# EAGLE board Botanic Buddy Design files (EAGLE 9.7.0)

Size 327.24 x 195.34 mm. Coordinates in mm from the lower left corner, seen from the top.
Outline: 0,0 327.24,0 327.24,195.34 0,195.34 0,0
Copper layers (1*16): Top 0.035mm / dielectric 1.5mm / Bottom 0.035mm
Design rules "default": minimum track width 6mil, minimum drill 0.35mm, track to track 6mil, track to pad 6mil, pad to pad 6mil, via to via 6mil, smd to smd 6mil, copper to edge 40mil, drill to drill 6mil, minimum pad ring 10mil, minimum via ring 8mil, stop-mask expansion 4mil, vias tented up to drill 0mil, thermal gap 10mil

## Footprints (pad centres in the part's own frame; a part is rotated, then mirrored left to right if it is on the bottom)
LEDRD254W60D565H860B = drill 0.981 pad 1.581: 1 -1.27,0; 2 1.27,0
LEDRD254W60D565H860B_G = drill 0.981 pad 1.581: 1 -1.27,0; 2 1.27,0
LEDRD254W60D565H860B_Y = drill 0.981 pad 1.581: 1 -1.27,0; 2 1.27,0
LEDRD254W60D565H860B_O = drill 0.981 pad 1.581: 1 -1.27,0; 2 1.27,0
1X02 = drill 1.016 long: 1 -1.27,0; 2 1.27,0
MOTOR = drill 1.118 pad 3.15 octagon: + 2.54,0; - -2.54,0
PIEZO = drill 1 pad 1.6: 1 -3.5,0; 2 3.5,0
SENRD254W50D503H320B = drill 0.7 pad 1.3: 1 -1.27,0; 2 1.27,0
RESAD1016W63L850D250B = drill 0.83 pad 1.43: 1 -5.08,0; 2 5.08,0
HA-06-SM065 = drill 1 pad 1.676: 1 -2.54,-2.54; 2 0,2.54; 3 2.54,-2.54
SEN-13322 = drill 1.016 long: 1 -2.54,0; 2 0,0; 3 2.54,0
JHD-162A = drill 1.016 long: 1 -19.05,0; 2 -16.51,0; 3 -13.97,0; 4 -11.43,0; 5 -8.89,0; 6 -6.35,0; 7 -3.81,0; 8 -1.27,0; 9 1.27,0; 10 3.81,0; 11 6.35,0; 12 8.89,0; 13 11.43,0; 14 13.97,0; 15 16.51,0; 16 19.05,0
ARDUINO-UNO-R3-SHIELD = drill 1.016 pad 1.88: 3.3V 24.13,-2.54; 5V 24.13,0; A0 24.13,12.7; A1 24.13,15.24; A2 24.13,17.78; A3 24.13,20.32; A4 24.13,22.86; A5 24.13,25.4; AREF -24.13,-13.97; D2 -24.13,20.32; D3 -24.13,17.78; D4 -24.13,15.24; D5 -24.13,12.7; D6 -24.13,10.16; D7 -24.13,7.62; D8 -24.13,3.81; D9 -24.13,1.27; D10 -24.13,-1.27; D11 -24.13,-3.81; D12 -24.13,-6.35; D13 -24.13,-8.89; GND@0 24.13,2.54; GND@1 24.13,5.08; GND@2 -24.13,-11.43; IOREF 24.13,-7.62; NC 24.13,-10.16; RES 24.13,-5.08; RX -24.13,25.4; SCL -24.13,-19.05; SDA -24.13,-16.51; TX -24.13,22.86; VIN 24.13,7.62
TO92 = drill 0.813 octagon: 1 -1.27,0; 2 0,1.905; 3 1.27,0

## Placement (x,y rotation side)
D1  RED  [LEDRD254W60D565H860B]  275.8,187.44 180 top
D2  GREEN  [LEDRD254W60D565H860B_G]  308.82,187.44 180 top
D3  YELLOW  [LEDRD254W60D565H860B_Y]  298.66,187.44 180 top
D4  ORANGE  [LEDRD254W60D565H860B_O]  288.5,187.44 180 top
L1  LIGHTBULB  [1X02]  321.52,187.44 0 top
M1  MOTOR_HDR  [MOTOR]  170.5,182.7 0 top
PIEZO1  PIEZO  [PIEZO]  133.69,168.07 0 top
Q1  PHOTOTRANSISTOR  [SENRD254W50D503H320B]  186.49,50.02 180 top
R1  330  [RESAD1016W63L850D250B]  274.53,174.74 90 top
R2  330  [RESAD1016W63L850D250B]  287.23,174.74 90 top
R3  330  [RESAD1016W63L850D250B]  297.39,174.74 90 top
R4  0.33k  [RESAD1016W63L850D250B]  307.55,174.74 90 top
R5  0.33k  [RESAD1016W63L850D250B]  320.25,174.74 90 top
R6  0.33k  [RESAD1016W63L850D250B]  116.95,51.74 90 top
R7  0.33k  [RESAD1016W63L850D250B]  187.7,37.87 90 top
RPOT1  250k  [HA-06-SM065]  132.2,83.77 0 top
SEN1  SEN-13322  [SEN-13322]  268.09,46.72 0 top
U1  LCD-16X2JHD-162A  [JHD-162A]  97.9,36.63 0 top
U2  ARDUINO-UNO-R3-SHIELD  [ARDUINO-UNO-R3-SHIELD]  199.6,112.53 270 top
U3  TMP36GT9Z_TO92  [TO92]  5.83,87.88 0 top

## Library data of the parts
D1 = Tinkercad; CATEGORY: Opto-Electronic; SUB-CATEGORY: LED; VALUE: LED_RED
D2 = Tinkercad; CATEGORY: Opto-Electronic; SUB-CATEGORY: LED; VALUE: LED_GREEN
D3 = Tinkercad; CATEGORY: Opto-Electronic; SUB-CATEGORY: LED; VALUE: LED_YELLOW
D4 = Tinkercad; CATEGORY: Opto-Electronic; SUB-CATEGORY: LED; VALUE: LED_ORANGE
L1 M1 PIEZO1 Q1 R1-R7 RPOT1 SEN1 U1-U3 = Tinkercad

## Nets
D1_C: D1.2 R1.2
D2_C: D2.2 R4.2
D3_C: D3.2 R3.2
D4_C: D4.2 R2.2
L1_1: L1.1 R5.2
U1_LED-: R6.1 U1.16
U1_VO: RPOT1.2 U1.3
U2_5V: Q1.2 RPOT1.1 SEN1.1 U1.2 U1.15 U2.5V U3.3
U2_A0: SEN1.3 U2.A0
U2_A1: U2.A1 U3.2
U2_A2: Q1.1 R7.2 U2.A2
U2_D2: D2.1 U2.D2
U2_D3: L1.2 U2.D3
U2_D4: U1.14 U2.D4
U2_D5: U1.13 U2.D5
U2_D6: U1.12 U2.D6
U2_D7: U1.11 U2.D7
U2_D8: M1.+ PIEZO1.1 U2.D8
U2_D9: U1.6 U2.D9
U2_D10: U1.4 U2.D10
U2_D11: D3.1 U2.D11
U2_D12: D4.1 U2.D12
U2_D13: D1.1 U2.D13
U2_GND: M1.- PIEZO1.2 R1.1 R2.1 R3.1 R4.1 R5.1 R6.2 R7.1 RPOT1.3 SEN1.2 U1.1 U1.5 U2.GND@0 U2.GND@1 U2.GND@2 U3.1

## Tracks (layer width: path | path; a pad name or v marks a point on that pad's centre or on a via)
D1_C  (1 unrouted)
D2_C  (1 unrouted)
D3_C  (1 unrouted)
D4_C  (1 unrouted)
L1_1  (1 unrouted)
U1_LED-  (1 unrouted)
U1_VO  (1 unrouted)
U2_5V  (6 unrouted)
U2_A0  (1 unrouted)
U2_A1  (1 unrouted)
U2_A2  (2 unrouted)
U2_D2  (1 unrouted)
U2_D3  (1 unrouted)
U2_D4  (1 unrouted)
U2_D5  (1 unrouted)
U2_D6  (1 unrouted)
U2_D7  (1 unrouted)
U2_D8  (2 unrouted)
U2_D9  (1 unrouted)
U2_D10  (1 unrouted)
U2_D11  (1 unrouted)
U2_D12  (1 unrouted)
U2_D13  (1 unrouted)
U2_GND  (16 unrouted)